# EAGLE board rc2014_8255 (EAGLE 7.6.0)
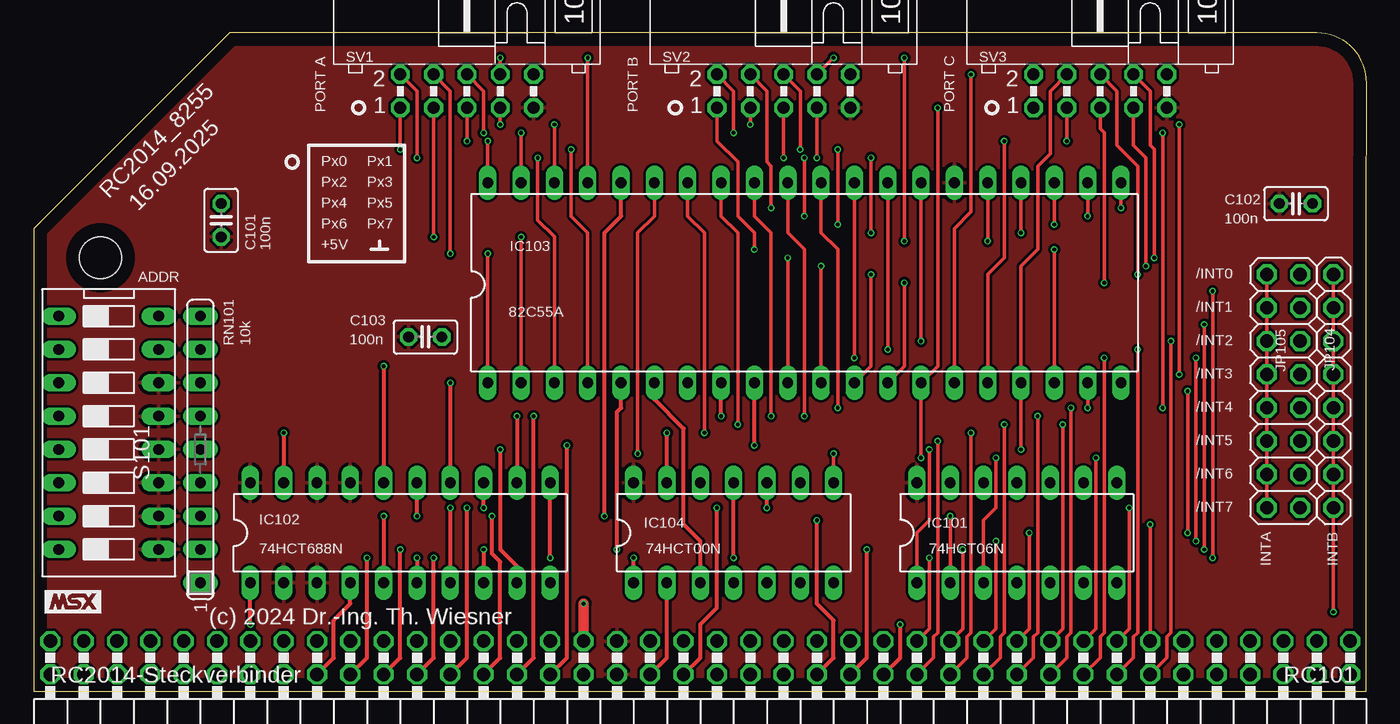
[diagram p0: board, top side]
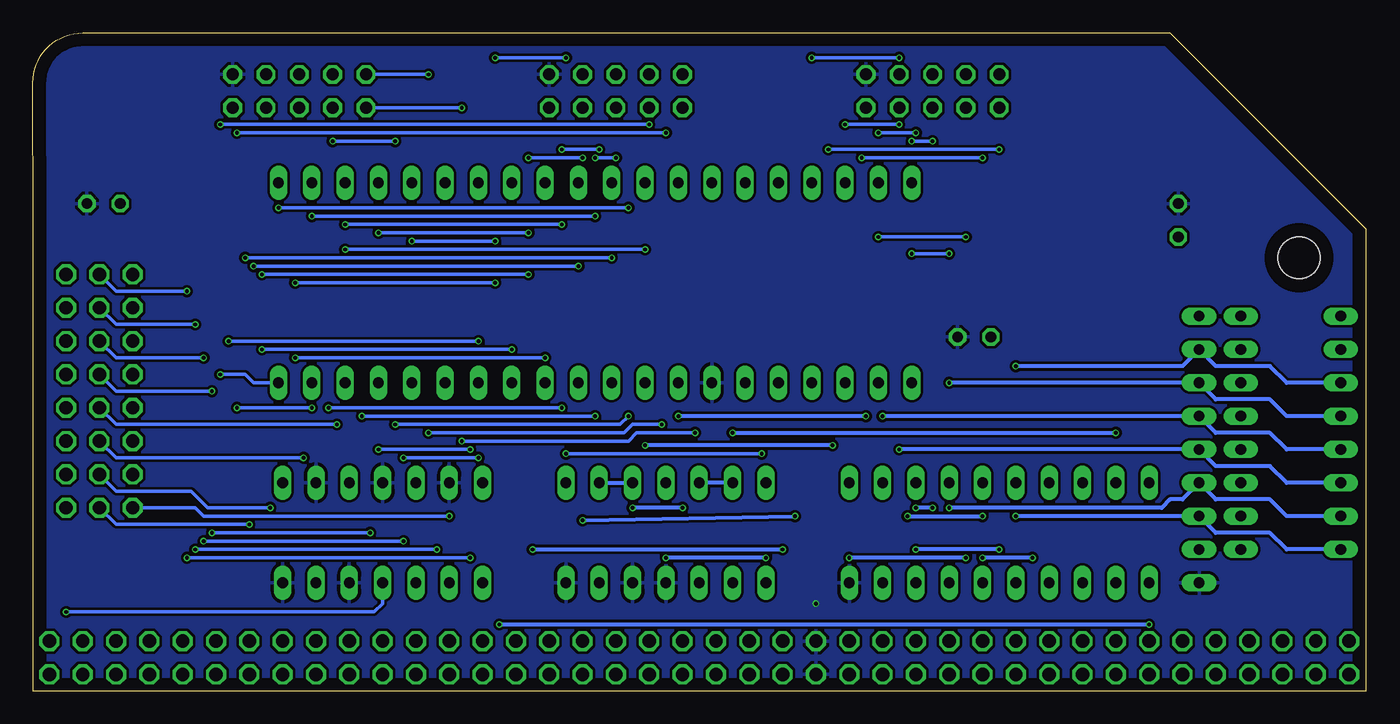
[diagram p1: board, bottom side, seen from below]

Size 101.6 x 50.16 mm. Coordinates in mm from the lower left corner, seen from the top.
Copper layers (1*16): Top 0.035mm / dielectric 1.5mm / Bottom 0.035mm
Design rules "default *": minimum track width 10mil, minimum drill 0.3mm, track to track 8mil, track to pad 4mil, pad to pad 8mil, via to via 8mil, smd to smd 8mil, copper to edge 40mil, drill to drill 8mil, minimum pad ring 10mil, minimum via ring 4mil, stop-mask expansion 4mil, vias tented up to drill 0mil, thermal gap 10mil

## Footprints (pad centres in the part's own frame; a part is rotated, then mirrored left to right if it is on the bottom)
C025-025X050 = drill 0.813 octagon: 1 -1.27,0; 2 1.27,0
DIL14 = drill 0.813 long: 1 -7.62,-3.81; 2 -5.08,-3.81; 3 -2.54,-3.81; 4 0,-3.81; 5 2.54,-3.81; 6 5.08,-3.81; 7 7.62,-3.81; 8 7.62,3.81; 9 5.08,3.81; 10 2.54,3.81; 11 0,3.81; 12 -2.54,3.81; 13 -5.08,3.81; 14 -7.62,3.81
DIL20 = drill 0.813 long: 1 -11.43,-3.81; 2 -8.89,-3.81; 3 -6.35,-3.81; 4 -3.81,-3.81; 5 -1.27,-3.81; 6 1.27,-3.81; 7 3.81,-3.81; 8 6.35,-3.81; 9 8.89,-3.81; 10 11.43,-3.81; 11 11.43,3.81; 12 8.89,3.81; 13 6.35,3.81; 14 3.81,3.81; 15 1.27,3.81; 16 -1.27,3.81; 17 -3.81,3.81; 18 -6.35,3.81; 19 -8.89,3.81; 20 -11.43,3.81
DIL40 = drill 0.813 long: 1 -24.13,-7.62; 2 -21.59,-7.62; 3 -19.05,-7.62; 4 -16.51,-7.62; 5 -13.97,-7.62; 6 -11.43,-7.62; 7 -8.89,-7.62; 8 -6.35,-7.62; 9 -3.81,-7.62; 10 -1.27,-7.62; 11 1.27,-7.62; 12 3.81,-7.62; 13 6.35,-7.62; 14 8.89,-7.62; 15 11.43,-7.62; 16 13.97,-7.62; 17 16.51,-7.62; 18 19.05,-7.62; 19 21.59,-7.62; 20 24.13,-7.62; 21 24.13,7.62; 22 21.59,7.62; 23 19.05,7.62; 24 16.51,7.62; 25 13.97,7.62; 26 11.43,7.62; 27 8.89,7.62; 28 6.35,7.62; 29 3.81,7.62; 30 1.27,7.62; 31 -1.27,7.62; 32 -3.81,7.62; 33 -6.35,7.62; 34 -8.89,7.62; 35 -11.43,7.62; 36 -13.97,7.62; 37 -16.51,7.62; 38 -19.05,7.62; 39 -21.59,7.62; 40 -24.13,7.62
1X08 = drill 1.016 octagon: 1 -8.89,0; 2 -6.35,0; 3 -3.81,0; 4 -1.27,0; 5 1.27,0; 6 3.81,0; 7 6.35,0; 8 8.89,0
2X08 = drill 1.016 octagon: 1 -8.89,-1.27; 2 -8.89,1.27; 3 -6.35,-1.27; 4 -6.35,1.27; 5 -3.81,-1.27; 6 -3.81,1.27; 7 -1.27,-1.27; 8 -1.27,1.27; 9 1.27,-1.27; 10 1.27,1.27; 11 3.81,-1.27; 12 3.81,1.27; 13 6.35,-1.27; 14 6.35,1.27; 15 8.89,-1.27; 16 8.89,1.27
RC2014-STECKER = drill 1.016 octagon: A1 -49.53,1.27; A2 -46.99,1.27; A3 -44.45,1.27; A4 -41.91,1.27; A5 -39.37,1.27; A6 -36.83,1.27; A7 -34.29,1.27; A8 -31.75,1.27; A9 -29.21,1.27; A10 -26.67,1.27; A11 -24.13,1.27; A12 -21.59,1.27; A13 -19.05,1.27; A14 -16.51,1.27; A15 -13.97,1.27; A16 -11.43,1.27; A17 -8.89,1.27; A18 -6.35,1.27; A19 -3.81,1.27; A20 -1.27,1.27; A21 1.27,1.27; A22 3.81,1.27; A23 6.35,1.27; A24 8.89,1.27; A25 11.43,1.27; A26 13.97,1.27; A27 16.51,1.27; A28 19.05,1.27; A29 21.59,1.27; A30 24.13,1.27; A31 26.67,1.27; A32 29.21,1.27; A33 31.75,1.27; A34 34.29,1.27; A35 36.83,1.27; A36 39.37,1.27; A37 41.91,1.27; A38 44.45,1.27; A39 46.99,1.27; A40 49.53,1.27; B1 -49.53,3.81; B2 -46.99,3.81; B3 -44.45,3.81; B4 -41.91,3.81; B5 -39.37,3.81; B6 -36.83,3.81; B7 -34.29,3.81; B8 -31.75,3.81; B9 -29.21,3.81; B10 -26.67,3.81; B11 -24.13,3.81; B12 -21.59,3.81; B13 -19.05,3.81; B14 -16.51,3.81; B15 -13.97,3.81; B16 -11.43,3.81; B17 -8.89,3.81; B18 -6.35,3.81; B19 -3.81,3.81; B20 -1.27,3.81; B21 1.27,3.81; B22 3.81,3.81; B23 6.35,3.81; B24 8.89,3.81; B25 11.43,3.81; B26 13.97,3.81; B27 16.51,3.81; B28 19.05,3.81; B29 21.59,3.81; B30 24.13,3.81; B31 26.67,3.81; B32 29.21,3.81; B33 31.75,3.81; B34 34.29,3.81; B35 36.83,3.81; B36 39.37,3.81; B37 41.91,3.81; B38 44.45,3.81; B39 46.99,3.81; B40 49.53,3.81 | hole 3.2: -45.72,33.02
SIL9 = drill 0.813 long: 1 -10.16,0; 2 -7.62,0; 3 -5.08,0; 4 -2.54,0; 5 0,0; 6 2.54,0; 7 5.08,0; 8 7.62,0; 9 10.16,0
DS-08 = drill 0.813 long: 1 -8.89,-3.81; 2 -6.35,-3.81; 3 -3.81,-3.81; 4 -1.27,-3.81; 5 1.27,-3.81; 6 3.81,-3.81; 7 6.35,-3.81; 8 8.89,-3.81; 9 8.89,3.81; 10 6.35,3.81; 11 3.81,3.81; 12 1.27,3.81; 13 -1.27,3.81; 14 -3.81,3.81; 15 -6.35,3.81; 16 -8.89,3.81
ML10L = drill 0.914 octagon: 1 -5.08,-1.27; 2 -5.08,1.27; 3 -2.54,-1.27; 4 -2.54,1.27; 5 0,-1.27; 6 0,1.27; 7 2.54,-1.27; 8 2.54,1.27; 9 5.08,-1.27; 10 5.08,1.27

## Placement (x,y rotation side)
C101  100n  [C025-025X050]  14.29,35.88 90 top
C102  100n  [C025-025X050]  96.2,37.15 0 top
C103  100n  [C025-025X050]  29.84,26.99 0 top
IC101  74HCT06N  [DIL14]  74.93,12.06 0 top
IC102  74HCT688N  [DIL20]  27.94,12.06 0 top
IC103  82C55A  [DIL40]  58.74,31.11 0 top
IC104  74HCT00N  [DIL14]  53.34,12.06 0 top
JP104  [1X08]  99.06,22.86 270 top
JP105  [2X08]  95.25,22.86 270 top
RC101  RC2014-Steckverbinder  [RC2014-STECKER]  50.8,0 0 top
RN101  10k  [SIL9]  12.7,18.41 90 top
S101  ADDR  [DS-08]  5.71,19.68 270 top
SV1  [ML10L]  33.02,45.72 0 top
SV2  [ML10L]  57.15,45.72 0 top
SV3  [ML10L]  81.28,45.72 0 top

## Library data of the parts
C101-C103 = rcl
IC101 IC102 IC104 = 74xx-eu
IC103 = micro-intel; MF: INTERSIL; MPN: IP82C55AZ; OC_FARNELL: 1562050; OC_NEWARK: 79K6939
JP104 JP105 = pinhead
RC101 = mbc
RN101 = resistor-sil; OC_FARNELL: unknown; OC_NEWARK: unknown
S101 = switch-dil; MPN: DS08; OC_FARNELL: unknown; OC_NEWARK: 73J0071
SV1-SV3 = con-ml; OC_FARNELL: unknown; OC_NEWARK: unknown

## Nets
+5V: C101.1 C102.1 C103.1 IC101.14 IC102.2 IC102.3 IC102.17 IC102.18 IC102.20 IC103.26 IC104.14 RC101.A18 RC101.B18 S101.9 S101.10 S101.11 S101.12 S101.13 S101.14 SV1.9 SV2.9 SV3.9
/CS: IC103.6 IC104.3
/INT0: JP105.2 RC101.B27
/INT1: JP105.4 RC101.B28
/INT2: JP105.6 RC101.B29
/INT3: JP105.8 RC101.B30
/INT4: JP105.10 RC101.B31
/INT5: JP105.12 RC101.B32
/INT6: JP105.14 RC101.B33
/INT7: JP105.16 RC101.B34
/INTA: IC101.2 JP105.1 JP105.3 JP105.5 JP105.7 JP105.9 JP105.11 JP105.13 JP105.15
/INTB: IC101.4 JP104.1 JP104.2 JP104.3 JP104.4 JP104.5 JP104.6 JP104.7 JP104.8
/IORQ: IC102.1 RC101.A26
/M1: IC104.2 RC101.A19
/PIOCS: IC102.19 IC104.12 IC104.13
/RD: IC103.5 RC101.A25
/RESET: IC104.9 IC104.10 RC101.A20
/WR: IC103.36 RC101.A24
A0: IC103.9 RC101.A16
A1: IC103.8 RC101.A15
A2: IC102.15 RC101.A14
A3: IC102.13 RC101.A13
A4: IC102.11 RC101.A12
A5: IC102.8 RC101.A11
A6: IC102.6 RC101.A10
A7: IC102.4 RC101.A9
D0: IC103.34 RC101.A27
D1: IC103.33 RC101.A28
D2: IC103.32 RC101.A29
D3: IC103.31 RC101.A30
D4: IC103.30 RC101.A31
D5: IC103.29 RC101.A32
D6: IC103.28 RC101.A33
D7: IC103.27 RC101.A34
GND: C101.2 C102.2 C103.2 IC101.5 IC101.7 IC101.9 IC101.11 IC101.13 IC102.10 IC103.7 IC104.4 IC104.5 IC104.7 RC101.A17 RC101.B17 RN101.1 SV1.10 SV2.10 SV3.10
N$1: IC104.1 IC104.11
N$6: IC102.16 RN101.8 S101.3
N$7: IC102.14 RN101.7 S101.4
N$8: IC102.12 RN101.6 S101.5
N$9: IC102.9 RN101.5 S101.6
N$10: IC102.7 RN101.4 S101.7
N$11: IC102.5 RN101.3 S101.8
PA0: IC103.4 SV1.1
PA1: IC103.3 SV1.2
PA2: IC103.2 SV1.3
PA3: IC103.1 SV1.4
PA4: IC103.40 SV1.5
PA5: IC103.39 SV1.6
PA6: IC103.38 SV1.7
PA7: IC103.37 SV1.8
PB0: IC103.18 SV2.1
PB1: IC103.19 SV2.2
PB2: IC103.20 SV2.3
PB3: IC103.21 SV2.4
PB4: IC103.22 SV2.5
PB5: IC103.23 SV2.6
PB6: IC103.24 SV2.7
PB7: IC103.25 SV2.8
PC0: IC101.3 IC103.14 SV3.1
PC1: IC103.15 SV3.2
PC2: IC103.16 SV3.3
PC3: IC101.1 IC103.17 SV3.4
PC4: IC103.13 SV3.5
PC5: IC103.12 SV3.6
PC6: IC103.11 SV3.7
PC7: IC103.10 SV3.8
RESET: IC103.35 IC104.8

## Tracks (layer width: path | path; a pad name or v marks a point on that pad's centre or on a via)
+5V
  pour Top: 0,0 0,35.24 14.92,50.16 101.6,50.16 101.6,0
/CS
  Top 0.305: IC104.3 50.8,11.43 49.53,12.7 49.53,20 47.31,22.23 IC103.6
/INT0  (via drill 0.3)
  Top 0.254: RC101.B27 68.26,4.76 v68.26,10.16 | v89.85,30.48 v89.85,10.16
  Bottom 0.254: JP105.2 95.25,30.48 v89.85,30.48 | v89.85,10.16 v68.26,10.16
/INT1  (via drill 0.3)
  Top 0.254: v89.22,27.94 v89.22,10.79 | v70.8,10.79 70.8,4.76 RC101.B28
  Bottom 0.254: JP105.4 95.25,27.94 v89.22,27.94 | v89.22,10.79 v70.8,10.79
/INT2  (via drill 0.3)
  Top 0.254: v88.58,25.4 v88.58,11.43 | v73.34,11.43 73.34,4.76 RC101.B29
  Bottom 0.254: JP105.6 95.25,25.4 v88.58,25.4 | v88.58,11.43 v73.34,11.43
/INT3  (via drill 0.3)
  Top 0.254: v87.95,22.86 v87.95,12.06 | v75.88,12.06 75.88,4.76 RC101.B30
  Bottom 0.254: JP105.8 95.25,22.86 v87.95,22.86 | v87.95,12.06 v75.88,12.06
/INT4  (via drill 0.3)
  Top 0.254: RC101.B31 78.42,4.76 v78.42,20.32
  Bottom 0.254: v78.42,20.32 95.25,20.32 JP105.10
/INT5  (via drill 0.3)
  Top 0.254: RC101.B32 80.96,4.76 v80.96,17.78
  Bottom 0.254: v80.96,17.78 95.25,17.78 JP105.12
/INT6  (via drill 0.3)
  Top 0.254: RC101.B33 83.5,4.76 v83.5,13.97
  Bottom 0.254: v83.5,13.97 88.27,13.97 89.53,15.24 95.25,15.24 JP105.14
/INT7  (via drill 0.3)
  Top 0.254: RC101.B34 v85.09,12.7
  Bottom 0.254: v85.09,12.7 95.25,12.7 JP105.16
/INTA  (via drill 0.3)
  Top 0.254: JP105.1 JP105.3 JP105.5 JP105.7 JP105.9 JP105.11 JP105.13 JP105.15 | v69.85,13.34 IC101.2
  Bottom 0.254: JP105.15 89.22,13.97 88.58,13.34 v69.85,13.34
/INTB  (via drill 0.3)
  Top 0.254: JP104.1 JP104.2 JP104.3 JP104.4 JP104.5 JP104.6 JP104.7 JP104.8 v99.06,6.03
  Bottom 0.254: v99.06,6.03 75.56,6.03 74.93,6.67 IC101.4
/IORQ  (via drill 0.3)
  Top 0.305: RC101.A26 66.04,2.54 v66.04,5.08 | v16.51,5.08 IC102.1
  Bottom 0.305: v66.04,5.08 v16.51,5.08
/M1
  Top 0.305: RC101.A19 48.26,2.54 IC104.2
/PIOCS  (via drill 0.3)
  Top 0.305: IC104.13 v48.26,19.68 | v19.05,19.68 IC102.19
  Bottom 0.305: IC104.13 IC104.12 | v48.26,19.68 v19.05,19.68
/RD  (via drill 0.3)
  Top 0.305: RC101.A25 63.5,2.54 v63.5,10.79 | v44.45,10.79 44.45,21.27 44.77,21.59 IC103.5
  Bottom 0.305: v63.5,10.79 v44.45,10.79
/RESET  (via drill 0.3)
  Top 0.305: RC101.A20 50.8,2.54 50.8,5.08 52.07,6.35 v52.07,13.97 | v55.88,13.97 IC104.10
  Bottom 0.305: v52.07,13.97 v55.88,13.97 | IC104.9 IC104.10
/WR  (via drill 0.3)
  Top 0.305: RC101.A24 60.96,2.54 60.96,5.4 59.69,6.67 v59.69,13.02 | v43.5,13.34 43.5,34.92 44.77,36.2 IC103.36
  Bottom 0.305: v59.69,13.02 v43.5,13.34
A0  (via drill 0.3)
  Top 0.305: RC101.A16 40.64,2.54 v40.64,18.73 | v54.93,18.73 IC103.9
  Bottom 0.305: v40.64,18.73 v54.93,18.73
A1  (via drill 0.3)
  Top 0.305: RC101.A15 38.1,2.54 v38.1,20.95 | v52.39,20.95 IC103.8
  Bottom 0.305: v38.1,20.95 v52.39,20.95
A2  (via drill 0.3)
  Top 0.305: RC101.A14 35.56,2.54 35.56,9.84 34.92,10.48 v34.92,13.34 | v29.21,13.34 IC102.15
  Bottom 0.305: v34.92,13.34 v29.21,13.34
A3  (via drill 0.3)
  Top 0.305: RC101.A13 33.02,2.54 v33.02,13.97 | v34.29,13.97 IC102.13
  Bottom 0.305: v33.02,13.97 v34.29,13.97
A4  (via drill 0.3)
  Top 0.305: RC101.A12 30.48,2.54 v30.48,10.16 | v39.37,10.16 IC102.11
  Bottom 0.305: v30.48,10.16 v39.37,10.16
A5  (via drill 0.3)
  Top 0.305: RC101.A11 27.94,2.54 v27.94,10.79 | v34.29,10.79 IC102.8
  Bottom 0.305: v27.94,10.79 v34.29,10.79
A6  (via drill 0.3)
  Top 0.305: RC101.A10 25.4,2.54 v25.4,10.16 | v29.21,10.16 IC102.6
  Bottom 0.305: v25.4,10.16 v29.21,10.16
A7
  Top 0.305: RC101.A9 22.86,2.54 22.86,5.4 24.13,6.67 IC102.4
D0  (via drill 0.3)
  Top 0.254: RC101.A27 68.58,2.54 68.58,4.13 68.9,4.45 v68.9,19.05 | v51.12,19.68 51.12,34.92 49.85,36.2 IC103.34
  Bottom 0.254: v68.9,19.05 56.2,19.05 55.56,19.68 v51.12,19.68
D1  (via drill 0.3)
  Top 0.254: RC101.A28 71.12,2.54 71.12,4.13 71.44,4.45 v71.44,19.68 | v53.66,20.32 53.66,34.92 52.39,36.2 IC103.33
  Bottom 0.254: v71.44,19.68 56.52,19.68 55.88,20.32 v53.66,20.32
D2  (via drill 0.3)
  Top 0.254: RC101.A29 73.66,2.54 73.66,4.13 73.98,4.45 v73.98,20.32 | v56.2,20.95 56.2,34.92 54.93,36.2 IC103.32
  Bottom 0.254: v73.98,20.32 56.83,20.32 v56.2,20.95
D3  (via drill 0.3)
  Top 0.254: RC101.A30 76.2,2.54 76.2,4.13 76.52,4.45 v76.52,20.95 | v58.74,20.95 58.74,33.66 57.47,34.92 IC103.31
  Bottom 0.254: v76.52,20.95 v58.74,20.95
D4  (via drill 0.3)
  Top 0.254: RC101.A31 78.74,2.54 78.74,4.13 79.06,4.45 v79.06,21.59 | v61.28,21.59 61.28,33.66 60.01,34.92 IC103.30
  Bottom 0.254: v79.06,21.59 v61.28,21.59
D5  (via drill 0.3)
  Top 0.254: RC101.A32 81.28,2.54 81.28,4.13 81.6,4.45 v81.6,25.4 | v62.55,25.4 IC103.29
  Bottom 0.254: v81.6,25.4 v62.55,25.4
D6  (via drill 0.3)
  Top 0.254: RC101.A33 83.82,2.54 83.82,4.13 84.14,4.45 v84.14,26.04 | v65.09,26.04 IC103.28
  Bottom 0.254: v84.14,26.04 v65.09,26.04
D7  (via drill 0.3)
  Top 0.254: RC101.A34 86.36,2.54 86.36,4.13 86.68,4.45 v86.68,26.67 | v67.63,26.67 IC103.27
  Bottom 0.254: v86.68,26.67 v67.63,26.67
GND  (via drill 0.3)
  Top 0.813: RC101.B17 v41.91,6.67
  pour Bottom: 0,0 0,35.24 14.92,50.16 101.6,50.16 101.6,0
N$1  (via drill 0.3)
  Top 0.305: IC104.1 v45.72,10.16 | v53.34,10.16 IC104.11
  Bottom 0.305: v45.72,10.16 v53.34,10.16
N$6  (via drill 0.3)
  Top 0.305: v26.67,24.77 IC102.16
  Bottom 0.305: S101.3 6.03,23.5 7.3,24.77 11.43,24.77 RN101.8 13.97,24.77 v26.67,24.77
N$7  (via drill 0.3)
  Top 0.305: v31.75,23.5 IC102.14
  Bottom 0.305: S101.4 6.03,20.95 7.3,22.23 11.43,22.23 RN101.7 v31.75,23.5
N$8  (via drill 0.3)
  Top 0.305: v36.83,20.95 IC102.12
  Bottom 0.305: S101.5 6.03,18.41 7.3,19.68 11.43,19.68 RN101.6 v36.83,20.95
N$9  (via drill 0.3)
  Top 0.305: v35.56,18.41 35.56,10.79 36.83,9.53 IC102.9
  Bottom 0.305: S101.6 6.03,15.88 7.3,17.14 11.43,17.14 RN101.5 v35.56,18.41
N$10  (via drill 0.3)
  Top 0.305: v31.75,13.97 IC102.7
  Bottom 0.305: S101.7 6.03,13.34 7.3,14.61 11.43,14.61 RN101.4 13.97,14.61 14.92,14.61 15.56,13.97 v31.75,13.97
N$11  (via drill 0.3)
  Top 0.305: v26.67,13.34 IC102.5
  Bottom 0.305: S101.8 6.03,10.79 7.3,12.06 11.43,12.06 RN101.3 v26.67,13.34
PA0  (via drill 0.3)
  Top 0.254: IC103.4 42.23,34.92 40.96,36.2 v40.96,41.27 | v27.94,41.27 SV1.1
  Bottom 0.254: v40.96,41.27 v27.94,41.27
PA1  (via drill 0.3)
  Top 0.254: IC103.3 39.69,34.61 38.42,35.88 v38.42,40.64 | v29.21,40.64 29.21,45.72 SV1.2
  Bottom 0.254: v38.42,40.64 v29.21,40.64
PA2  (via drill 0.3)
  Top 0.254: SV1.3 v30.48,34.61 | v37.15,34.61 IC103.2
  Bottom 0.254: v30.48,34.61 v37.15,34.61
PA3  (via drill 0.3)
  Top 0.254: SV1.4 31.75,45.72 v31.75,33.34 | v34.61,33.34 IC103.1
  Bottom 0.254: v31.75,33.34 v34.61,33.34
PA4  (via drill 0.3)
  Top 0.254: IC103.40 v34.61,41.91 | v33.02,41.91 SV1.5
  Bottom 0.254: v34.61,41.91 v33.02,41.91
PA5  (via drill 0.3)
  Top 0.254: IC103.39 v37.15,42.55 | v34.29,42.55 34.29,45.72 SV1.6
  Bottom 0.254: v37.15,42.55 v34.29,42.55
PA6  (via drill 0.3)
  Top 0.254: IC103.38 v39.69,43.18 | v35.56,43.18 SV1.7
  Bottom 0.254: v39.69,43.18 v35.56,43.18
PA7  (via drill 0.3)
  Top 0.254: IC103.37 v42.23,48.26 | v35.56,48.26 SV1.8
  Bottom 0.254: v42.23,48.26 v35.56,48.26
PB0  (via drill 0.3)
  Top 0.254: SV2.1 52.07,41.91 53.66,40.32 53.66,36.2 54.93,34.92 v54.93,33.66 | v77.79,33.66 IC103.18
  Bottom 0.254: v54.93,33.66 v77.79,33.66
PB1  (via drill 0.3)
  Top 0.254: SV2.2 53.34,45.72 v53.34,42.55 | v86.04,42.55 v86.04,21.59 | v80.33,21.59 IC103.19
  Bottom 0.254: v53.34,42.55 v86.04,42.55 | v86.04,21.59 v80.33,21.59
PB2  (via drill 0.3)
  Top 0.254: SV2.3 v54.61,43.18 | v87.31,43.18 v87.31,24.13
  Bottom 0.254: v54.61,43.18 v87.31,43.18 | v87.31,24.13 85.41,24.13 84.77,23.5 IC103.20
PB3  (via drill 0.3)
  Top 0.254: IC103.21 v82.87,36.83 | v56.2,36.83 56.2,40.01 55.88,40.32 55.88,45.72 SV2.4
  Bottom 0.254: v82.87,36.83 v56.2,36.83
PB4  (via drill 0.3)
  Top 0.254: IC103.22 v80.33,36.2 | v58.74,36.2 v58.74,40.64 | v57.15,40.64 SV2.5
  Bottom 0.254: v80.33,36.2 v58.74,36.2 | v58.74,40.64 v57.15,40.64
PB5  (via drill 0.3)
  Top 0.254: IC103.23 v77.79,35.56 | v61.28,35.56 v61.28,41.27 | v58.42,41.27 58.42,45.72 SV2.6
  Bottom 0.254: v77.79,35.56 v61.28,35.56 | v61.28,41.27 v58.42,41.27
PB6  (via drill 0.3)
  Top 0.254: IC103.24 v75.25,34.92 | v63.82,34.92 v63.82,40.64 | v59.69,40.64 SV2.7
  Bottom 0.254: v75.25,34.92 v63.82,34.92 | v63.82,40.64 v59.69,40.64
PB7  (via drill 0.3)
  Top 0.254: IC103.25 v72.71,34.29 | v66.36,34.29 v66.36,48.26 | v60.96,48.26 SV2.8
  Bottom 0.254: v72.71,34.29 v66.36,34.29 | v66.36,48.26 v60.96,48.26
PC0  (via drill 0.3)
  Top 0.254: IC101.3 72.39,13.02 73.34,13.97 v73.34,17.78 | v67.63,17.78 IC103.14 68.9,24.77 v68.9,44.45
  Bottom 0.254: v73.34,17.78 v67.63,17.78 | v68.9,44.45 SV3.1
PC1  (via drill 0.3)
  Top 0.254: IC103.15 70.17,35.24 71.44,36.51 v71.44,46.99
  Bottom 0.254: v71.44,46.99 SV3.2
PC2  (via drill 0.3)
  Top 0.254: IC103.16 72.71,31.75 73.98,33.02 v73.98,41.91 | v78.74,41.91 SV3.3
  Bottom 0.254: v73.98,41.91 v78.74,41.91
PC3  (via drill 0.3)
  Top 0.254: IC101.1 67.31,12.06 68.26,13.02 v68.26,18.41 | v75.25,18.41 IC103.17 75.25,32.38 76.52,33.66 76.52,40.01 77.47,40.96 77.47,45.72 SV3.4
  Bottom 0.254: v68.26,18.41 v75.25,18.41
PC4  (via drill 0.3)
  Top 0.254: IC103.13 66.36,24.77 v66.36,31.11 | v81.6,31.11 81.6,42.55 81.28,42.86 SV3.5
  Bottom 0.254: v66.36,31.11 v81.6,31.11
PC5  (via drill 0.3)
  Top 0.254: IC103.12 63.82,24.77 v63.82,31.75 | v84.14,31.75 84.14,40.01 82.55,41.59 82.55,45.72 SV3.6
  Bottom 0.254: v63.82,31.75 v84.14,31.75
PC6  (via drill 0.3)
  Top 0.254: IC103.11 v60.01,32.38 | v84.77,32.38 84.77,40.64 83.82,41.59 SV3.7
  Bottom 0.254: v60.01,32.38 v84.77,32.38
PC7  (via drill 0.3)
  Top 0.254: IC103.10 v57.47,33.02 | v85.41,33.02 85.41,41.27 85.09,41.59 85.09,45.72 SV3.8
  Bottom 0.254: v57.47,33.02 v85.41,33.02
RESET  (via drill 0.3)
  Top 0.254: IC103.35 47.31,36.2 46.04,34.92 v46.04,18.1 | v60.96,18.1 IC104.8
  Bottom 0.254: v46.04,18.1 v60.96,18.1

## Text on the board
tNames: PORT A | PORT B | PORT C | Px0 | Px1 | Px2 | Px3 | RC2014_8255 | 16.09.2025 | Px4 | Px5 | Px6 | Px7 | +5V | /INT0 | /INT1 | /INT2 | /INT3 | /INT4 | /INT5 | /INT6 | /INT7 | INTA | INTB | (c) 2024 Dr.-Ing. Th. Wiesner